# EAGLE board dev-test-proto (EAGLE 7.3.0)
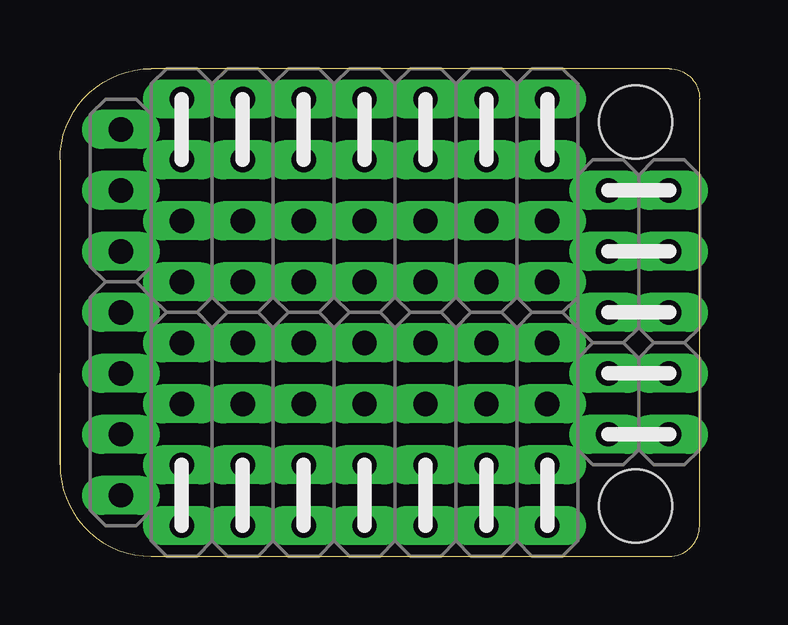
[diagram p0: board, top side]

Size 26.67 x 20.32 mm. Coordinates in mm from the lower left corner, seen from the top.
Outline: 0,3.81 0,7.62
Outline: 0,3.81 arc90 3.81,0 25.4,0 arc90 26.67,1.27 26.67,19.05 arc90 25.4,20.32 3.81,20.32 arc90 0,16.51 0,3.81
Copper layers (1*16): Top 0.0356mm / dielectric 1.5011mm / Bottom 0.0356mm
Design rules "oshpark *": minimum track width 6mil, minimum drill 18mil, track to track 6mil, track to pad 6mil, pad to pad 6mil, via to via 6mil, smd to smd 6mil, copper to edge 15mil, drill to drill 6mil, minimum pad ring 7mil, minimum via ring 7mil, stop-mask expansion 4mil, vias tented up to drill 4.1mm, thermal gap 10mil
Holes 3.05 mm at 24,2.1 24,18.1

## Footprints (pad centres in the part's own frame; a part is rotated, then mirrored left to right if it is on the bottom)
PINHEADER-100MIL-1X4-NOSILK = drill 1.016 long: 1 -3.81,0; 2 -1.27,0; 3 1.27,0; 4 3.81,0
PINHEADER-100MIL-1X3-NOSILK = drill 1.016 long: 1 -2.54,0; 2 0,0; 3 2.54,0
PINHEADER-100MIL-1X2-NOSILK = drill 1.016 long: 1 -1.27,0; 2 1.27,0

## Placement (x,y rotation side)
CON1  [PINHEADER-100MIL-1X4-NOSILK]  17.78,5.08 90 top
CON4  [PINHEADER-100MIL-1X4-NOSILK]  17.78,15.24 90 top
CON5  [PINHEADER-100MIL-1X4-NOSILK]  20.32,15.24 90 top
CON6  [PINHEADER-100MIL-1X4-NOSILK]  20.32,5.08 90 top
CON7  [PINHEADER-100MIL-1X4-NOSILK]  12.7,5.08 90 top
CON8  [PINHEADER-100MIL-1X4-NOSILK]  12.7,15.24 90 top
CON9  [PINHEADER-100MIL-1X4-NOSILK]  15.24,15.24 90 top
CON14  [PINHEADER-100MIL-1X4-NOSILK]  15.24,5.08 90 top
CON15  [PINHEADER-100MIL-1X4-NOSILK]  7.62,5.08 90 top
CON16  [PINHEADER-100MIL-1X4-NOSILK]  7.62,15.24 90 top
CON17  [PINHEADER-100MIL-1X4-NOSILK]  10.16,15.24 90 top
CON18  [PINHEADER-100MIL-1X4-NOSILK]  10.16,5.08 90 top
CON19  [PINHEADER-100MIL-1X4-NOSILK]  2.54,6.35 90 top
CON21  [PINHEADER-100MIL-1X4-NOSILK]  5.08,15.24 90 top
CON22  [PINHEADER-100MIL-1X4-NOSILK]  5.08,5.08 90 top
E$1  [PINHEADER-100MIL-1X3-NOSILK]  2.54,15.24 90 top
E$2  [PINHEADER-100MIL-1X3-NOSILK]  25.4,12.7 90 top
E$3  [PINHEADER-100MIL-1X3-NOSILK]  22.86,12.7 90 top
E$4  [PINHEADER-100MIL-1X2-NOSILK]  22.86,6.35 90 top
E$5  [PINHEADER-100MIL-1X2-NOSILK]  25.4,6.35 90 top

## Library data of the parts
CON1 CON4-CON9 CON14-CON19 CON21 CON22 E$1-E$5 = p.peter-connectors

## Nets
+3V3: CON6.1 CON6.2
+5V: CON4.3 CON4.4
GND: CON21.3 CON21.4
GPIO0: CON22.1 CON22.2
GPIO2: CON15.1 CON15.2
GPIO12: CON14.1 CON14.2
GPIO13: CON7.1 CON7.2
GPIO14: CON1.1 CON1.2
GPIO15: CON18.1 CON18.2
GPIO16: CON8.3 CON8.4
RESET: CON9.3 CON9.4
RX: CON17.3 CON17.4
S$1: CON5.3 CON5.4
S$2: E$2.3 E$3.3
S$3: E$2.2 E$3.2
S$4: E$2.1 E$3.1
S$5: E$4.2 E$5.2
S$6: E$4.1 E$5.1
TX: CON16.3 CON16.4

## Tracks (layer width: path | path; a pad name or v marks a point on that pad's centre or on a via)
+3V3
  Top 0.61: CON6.2 20.32,2.54 CON6.1
+5V
  Top 0.61: CON4.3 17.78,17.78 CON4.4
GND
  Top 0.61: CON21.3 5.08,17.78 CON21.4
GPIO0
  Top 0.61: CON22.2 5.08,2.54 CON22.1
GPIO2
  Top 0.61: CON15.2 7.62,2.54 CON15.1
GPIO12
  Top 0.61: CON14.2 15.24,2.54 CON14.1
GPIO13
  Top 0.61: CON7.2 12.7,2.54 CON7.1
GPIO14
  Top 0.61: CON1.2 17.78,2.54 CON1.1
GPIO15
  Top 0.61: CON18.2 10.16,2.54 CON18.1
GPIO16
  Top 0.61: CON8.3 12.7,17.78 CON8.4
RESET
  Top 0.61: CON9.3 15.24,17.78 CON9.4
RX
  Top 0.61: CON17.3 10.16,17.78 CON17.4
S$1
  Top 0.61: CON5.3 20.32,17.78 CON5.4
S$2
  Top 0.61: E$2.3 E$3.3
S$3
  Top 0.61: E$2.2 E$3.2
S$4
  Top 0.61: E$2.1 E$3.1
S$5
  Top 0.61: E$5.2 E$4.2
S$6
  Top 0.61: E$5.1 E$4.1
TX
  Top 0.61: CON16.3 7.62,17.78 CON16.4